# Altium PCB PCB1_NQI_MEZ.PcbDoc
Units mm, origin at the board's own origin, x right, y up, seen from the top; angles counter-clockwise.
Board outline 61.5 x 59 mm, 2 copper layers (Top Layer, Bottom Layer); 4 components, 19 nets, 45 pads, 0 vias.
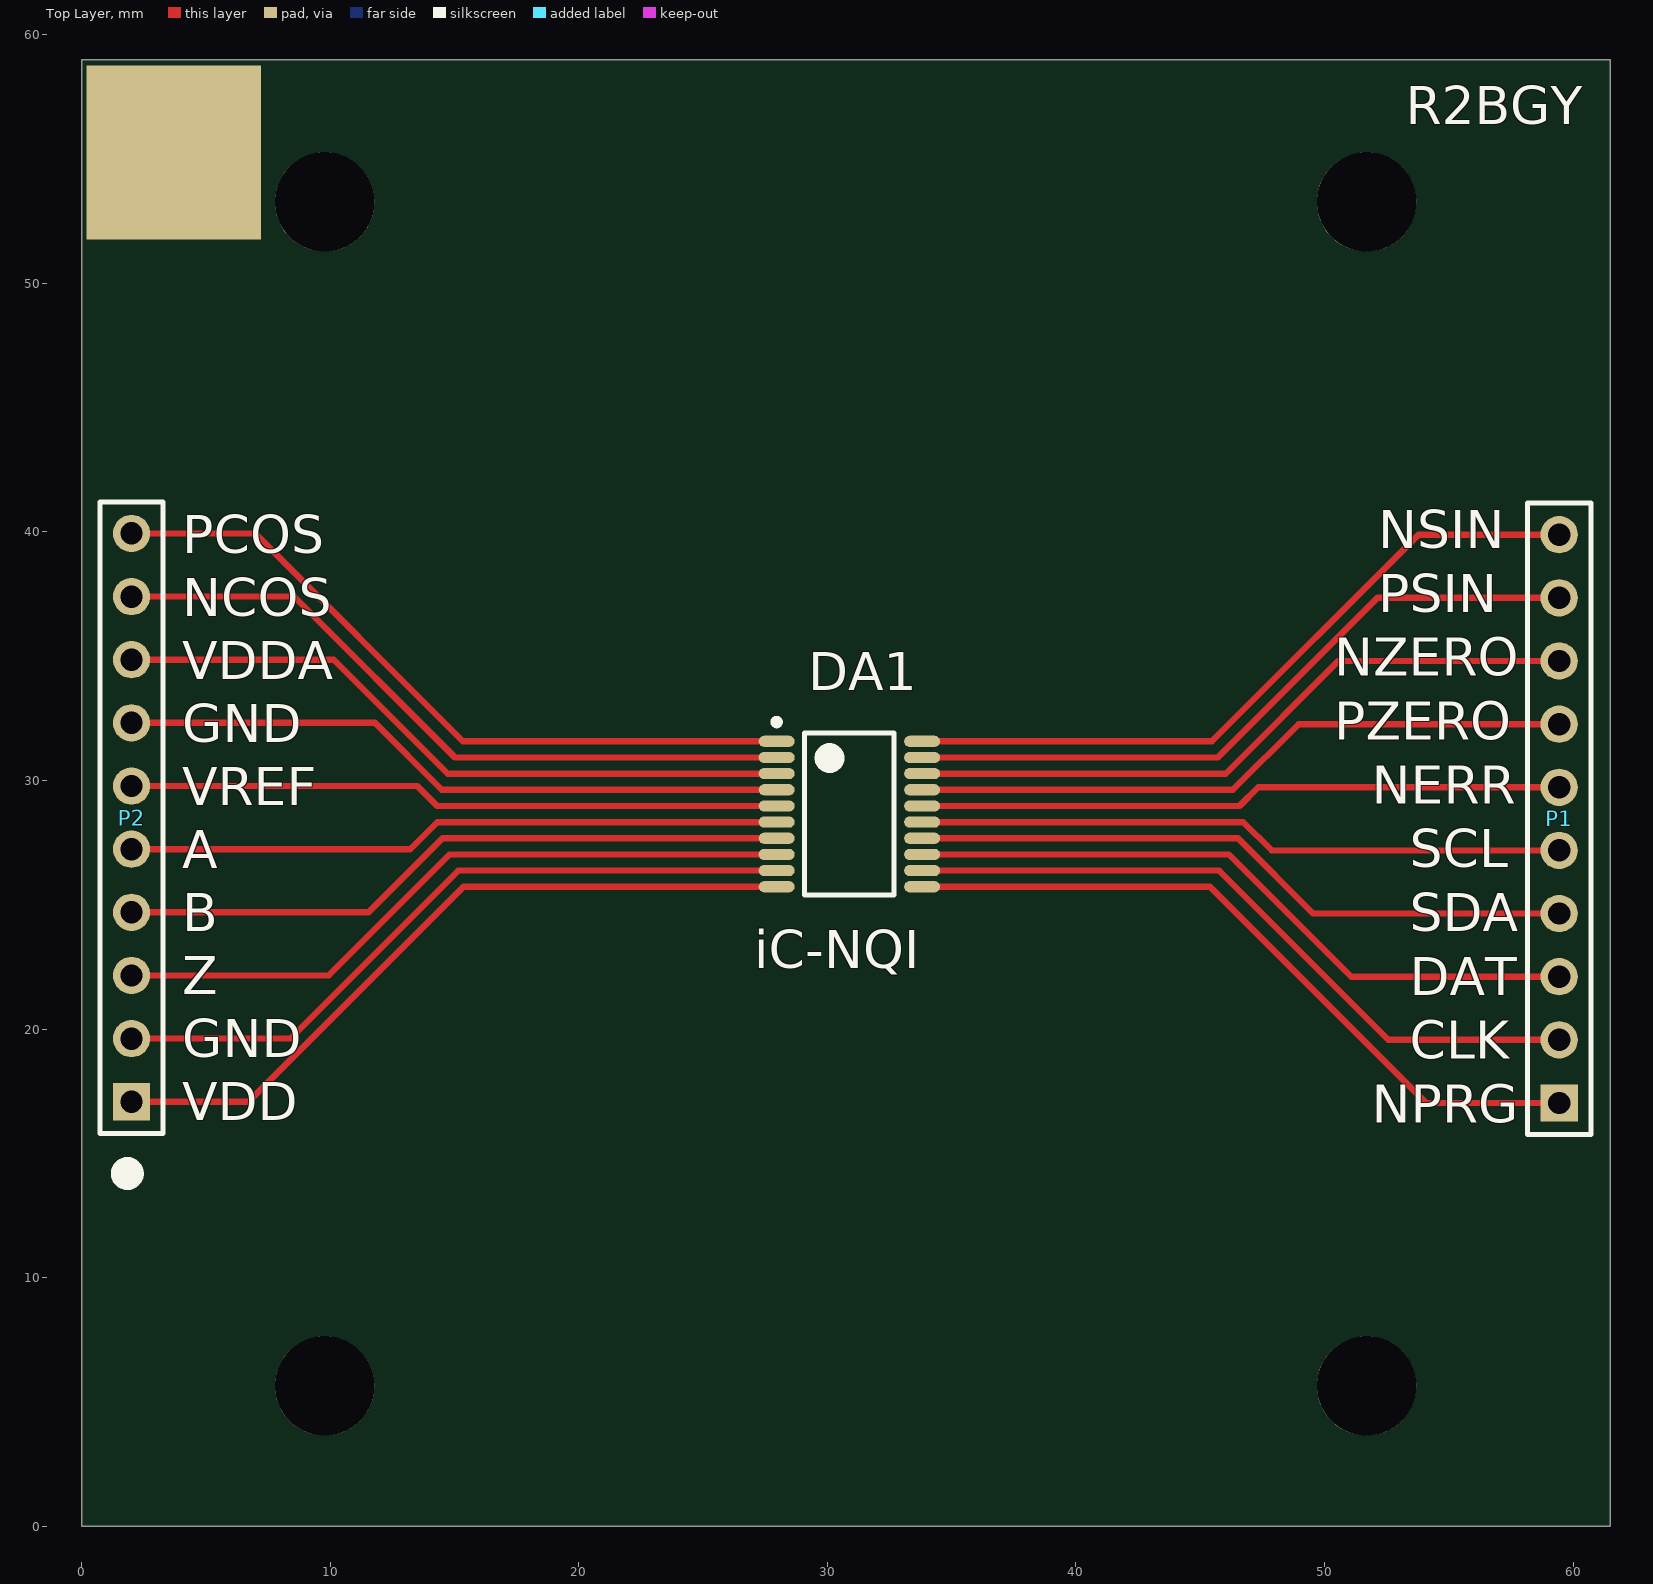
[diagram p0: Top Layer view]
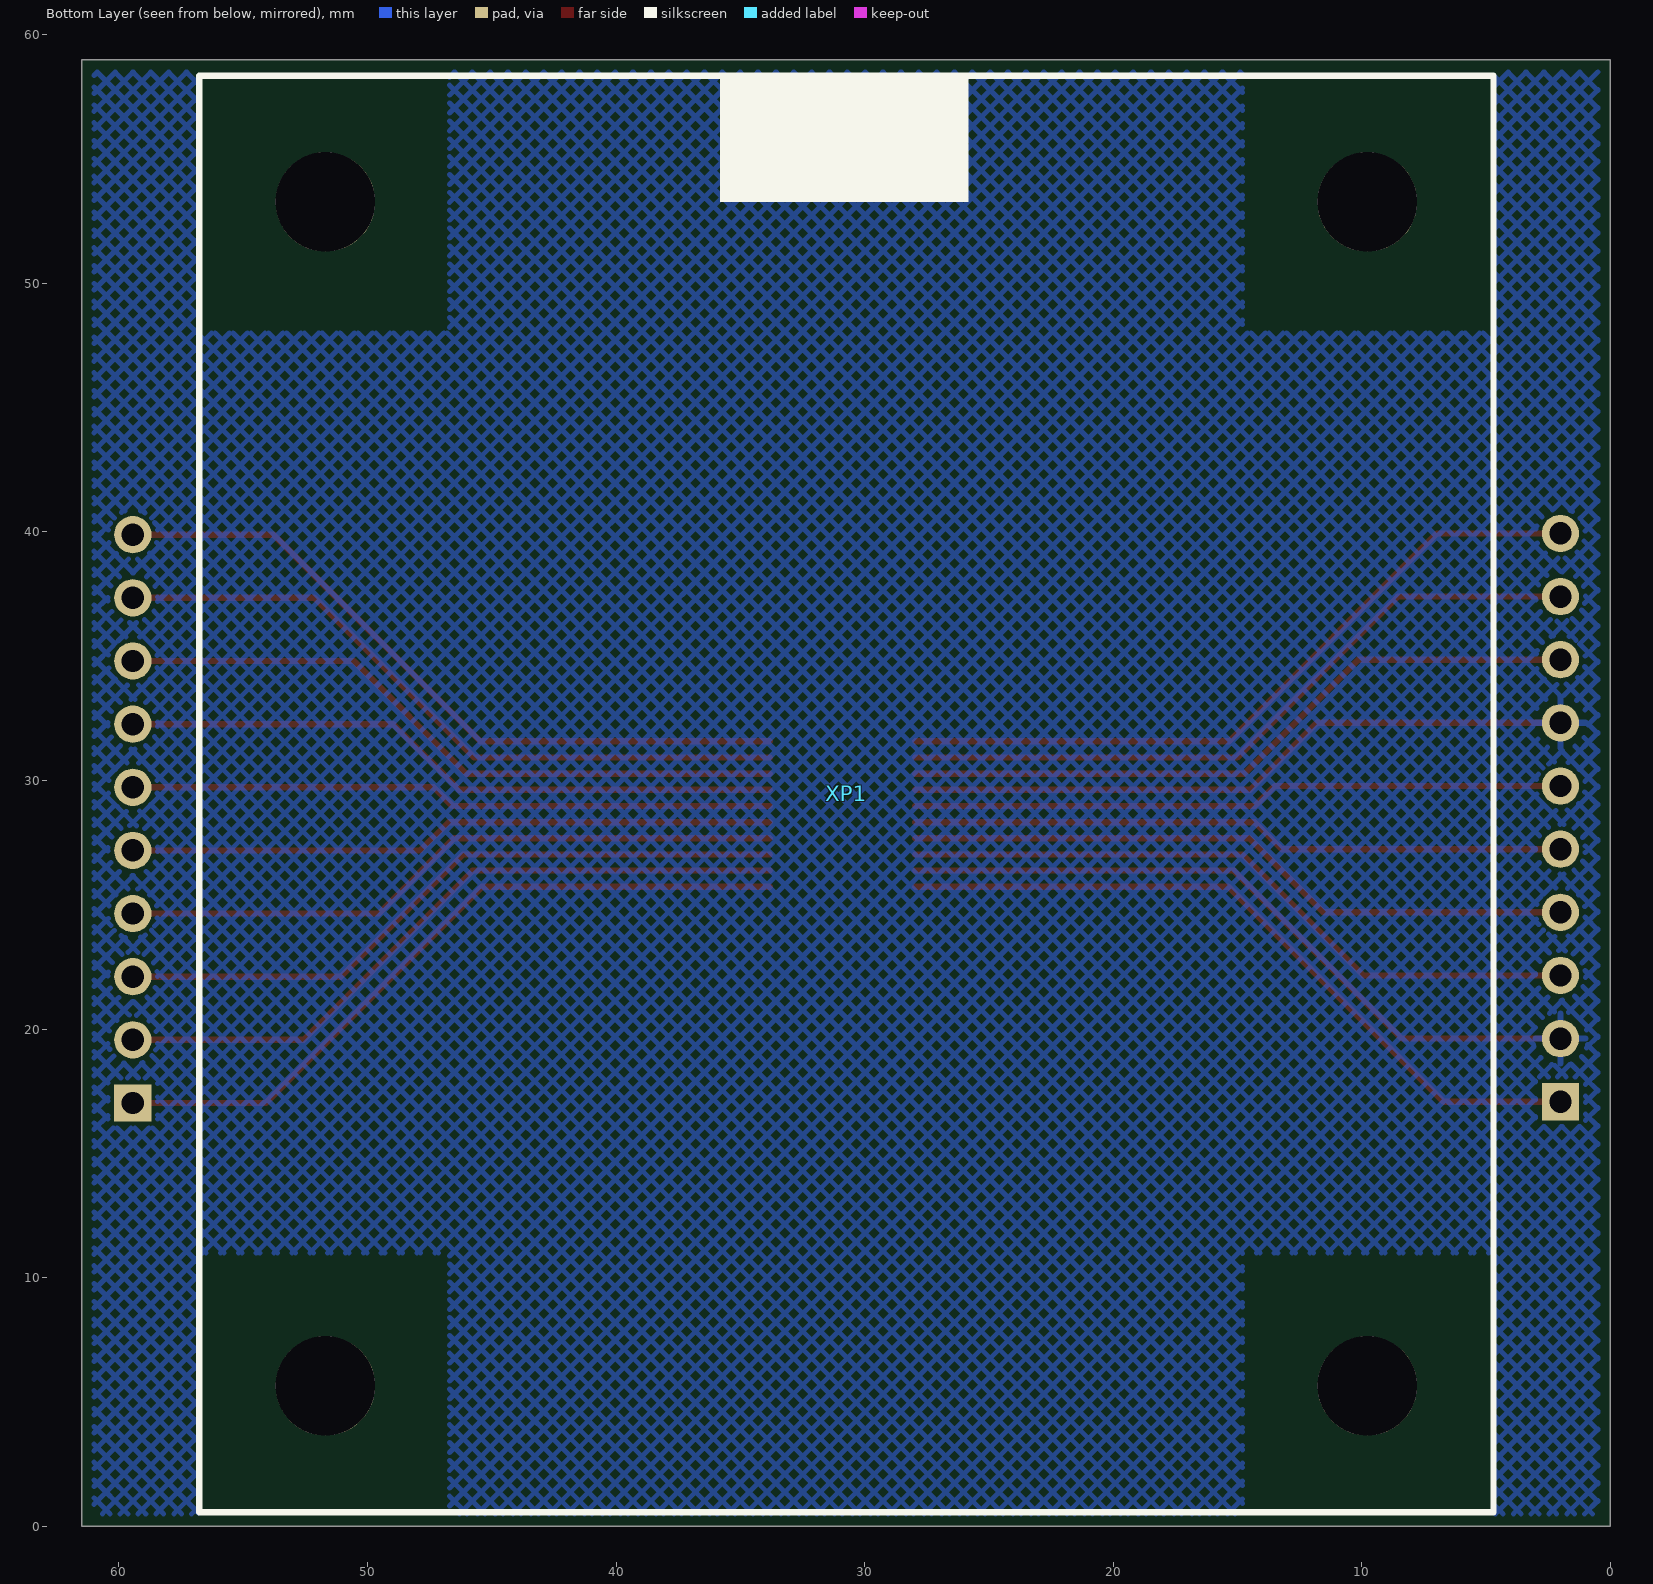
[diagram p1: Bottom Layer view, seen from below]

## Layer stack, top to bottom
Top Solder: solder mask 0.0102, Solder Resist, Dk 3.5
Top Layer: signal copper 0.0356
Dielectric 1: dielectric 0.32, FR-4, Dk 4.8
Bottom Layer: signal copper 0.0356
Bottom Solder: solder mask 0.0102, Solder Resist, Dk 3.5

## Board outline
0,0 0,59 61.5,59 61.5,0

## Design rules (kind name [scope] priority, off if disabled: settings)
Clearance [All] p1: gap=0.15 ignorepadtopadclearanceinfootprint=FALSE
HoleSize [All] p1: absolutevalues=TRUE maxlimit=10 minlimit=0.025 maxpercent=80.000 minpercent=20.000
PolygonConnect [All] p1: connectstyle=Relief reliefconductorwidth=0.254 reliefentries=4 polygonreliefangle="90 Angle" airgapwidth=0.254
RoutingVias [All] p1: holewidth=0.711 width=1.27 viastyle="Through Hole" minholewidth=0.711 minwidth=1.27 maxholewidth=0.711 maxwidth=1.27
SolderMaskExpansion [All] p1: expansion=0.102 istentingtop=FALSE
Width [All] p1: maxlimit=0.254 minlimit=0.125 preferedwidth=0.254
29 further rules are at their usual default settings.

## Components (designator, comment, footprint, x,y, rotation, side; value= is the part's Value field where it differs from the comment)
DA1 "iC-NQI" iC-NQI 30.886,28.651 r0 top
P1 "Header 10" HDR1X10 59.439,17.027 r90 top
P2 "Header 10" HDR1X10 2.009,17.078 r90 top
XP1 "Грелка" Грелка 51.692,5.648 r270 bottom

## Footprints (in the part's own frame and the unit in brackets; to place one, negate y for a bottom-side part, rotate by r counter-clockwise, add the part's x,y. Pads: shape width x height; smd on the part's side, far side on the other; paste and mask are expansions set on the pad)
HDR1X10 [mm] "Connector; Header; 10 Position"
  rect 1.5x1.5 hole 0.9: 1(0,0)
  round 1.5 hole 0.9: 2(2.54,0) 3(5.08,0) 4(7.62,0) 5(10.16,0) 6(12.7,0) 7(15.24,0) 8(17.78,0) 9(20.32,0) 10(22.86,0)
  silkscreen extent -1.27,-1.27 24.13,1.27
iC-NQI [mm] "TSOP, 20-Leads, Body 6,50x4,40mm, Pitch 0,65mm, IPC Medium Density"
  oval 1.45x0.45 smd: 1(-2.925,2.925) 2(-2.925,2.275) 3(-2.925,1.625) 4(-2.925,0.975) 5(-2.925,0.325) 6(-2.925,-0.325) 7(-2.925,-0.975) 8(-2.925,-1.625) 9(-2.925,-2.275) 10(-2.925,-2.925) 11(2.925,-2.925) 12(2.925,-2.275) 13(2.925,-1.625) 14(2.925,-0.975) 15(2.925,-0.325) 16(2.925,0.325) 17(2.925,0.975) 18(2.925,1.625) 19(2.925,2.275) 20(2.925,2.925)
  silkscreen extent -3.05,-3.25 1.8,3.82, body extent -2.2,-3.25 2.2,3.25, height 1
Грелка [mm]
  round 4 hole 4 unplated: 0(-47.625,0) 0(-47.625,41.91) 0(0,0) 0(0,41.91)
  silkscreen extent -52.7,-5.08 5.08,46.99

## Part data
DA1: "Оптический энкодер"
P1 P2: "Header, 10-Pin", LatestRevisionDate=17-Jul-2002, LatestRevisionNote="Re-released for DXP Platform.", Publisher="Altium Limited"

## Free pads (board coordinates)
  rect 7x7 smd: 2(3.708,55.27)

## Nets (pads, with @x,y where several pads share a name; then routed paths per layer and width w, separated by ;. In a path a pad name is that pad's centre, name@x,y a point inside that pad or via, vN(x,y) a via of type N, cw(c..) or ccw(c..) an arc to the next point about the centre after c; other vN are vias at no path point)
A: DA1.6 P2.5 | length 26.6
  Top Layer w0.254: P2.5@1.809,27.238 13.217,27.238 14.305,28.326 DA1.6
B: DA1.7 P2.4 | length 27.6
  Top Layer w0.254: P2.4@1.64,24.698 11.541,24.698 14.519,27.676 DA1.7
CLK: DA1.12 P1.2 | length 28.6
  Top Layer w0.254: DA1.12 45.76,26.376 52.569,19.567 P1.2@59.552,19.567
DAT: DA1.13 P1.3 | length 27.9
  Top Layer w0.254: DA1.13 46.151,27.026 51.07,22.107 P1.3@59.674,22.107
GND: DA1.4 DA1.9 P2.2 P2.7 | length 56.3
  Top Layer w0.254: P2.7@1.662,32.318 11.802,32.318 14.494,29.626 DA1.4 ; P2.2@1.836,19.618 8.391,19.618 15.149,26.376 DA1.9
NCOS: DA1.2 P2.9 | length 29.1
  Top Layer w0.254: P2.9@1.546,37.398 8.55,37.398 15.022,30.926 DA1.2
NERR: DA1.16 P1.6 | length 26.4
  Top Layer w0.254: DA1.16 46.578,28.976 47.33,29.727 P1.6@59.933,29.727
NPRG: DA1.11 P1.1 | length 29.2
  Top Layer w0.254: DA1.11 45.394,25.726 54.093,17.027 P1.1
NSIN: DA1.20 P1.10 | length 29.4
  Top Layer w0.254: DA1.20 45.47,31.576 53.781,39.887 P1.10@59.771,39.887
NZERO: DA1.18 P1.8 | length 27.8
  Top Layer w0.254: DA1.18 46.024,30.276 50.555,34.807 P1.8@59.771,34.807
PCOS: DA1.1 P2.10 | length 29.9
  Top Layer w0.254: P2.10@1.477,39.938 6.976,39.938 15.338,31.576 DA1.1
PSIN: DA1.19 P1.9 | length 28.6
  Top Layer w0.254: DA1.19 45.709,30.926 52.13,37.347 P1.9@59.773,37.347
PZERO: DA1.17 P1.7 | length 26.9
  Top Layer w0.254: DA1.17 46.314,29.626 48.955,32.267 P1.7@59.633,32.267
SCL: DA1.15 P1.5 | length 26.5
  Top Layer w0.254: DA1.15 46.731,28.326 47.87,27.187 P1.5@59.86,27.187
SDA: DA1.14 P1.4 | length 27.1
  Top Layer w0.254: DA1.14 46.517,27.676 49.546,24.647 P1.4@59.706,24.647
VDD: DA1.10 P2.1 | length 29.9
  Top Layer w0.254: P2.1@1.643,17.078 6.715,17.078 15.363,25.726 DA1.10
VDDA: DA1.3 P2.8 | length 28.5
  Top Layer w0.254: P2.8@1.396,34.858 10.151,34.858 14.733,30.276 DA1.3
VREF: DA1.5 P2.6 | length 26.5
  Top Layer w0.254: P2.6@1.836,29.778 13.503,29.778 14.305,28.976 DA1.5
Z: DA1.8 P2.3 | length 28.3
  Top Layer w0.254: P2.3@1.662,22.158 9.941,22.158 14.809,27.026 DA1.8
pads on no net: XP1.0

## Polygon pours and split planes (outlines as drawn)
GND on Bottom Layer "Top Overlay-No Net" (hatched 45Degree grid 0.508 track 0.203, remove dead copper, pour order 0): 0.5,0.5 61,0.5 61,58.5 0.5,58.5

## Other copper
Bottom Layer:
  pour cut-out: 4.7,11 4.7,0.2 14.8,0.2 14.8,11
  pour cut-out: 46.7,11 46.7,0.3 56.8,0.3 56.8,11
  pour cut-out: 46.7,58.7 46.7,48 56.8,48 56.8,58.7
  pour cut-out: 4.7,58.7 4.7,48 14.8,48 14.8,58.7

## Silkscreen, mask and mechanical layers (free items; w line width, h text height)
Top Overlay:
  circle w0.7: c1.841,14.189 r0.313
  text "R2BGY" at 53.265,56.388 h1.52
  text "NSIN" at 52.16,39.338 h1.52
  text "PCOS" at 4.044,39.138 h1.52
  text "PSIN" at 52.16,36.771 h1.52
  text "NCOS" at 4.044,36.605 h1.52
  text "NZERO" at 50.382,34.204 h1.52
  text "VDDA" at 4.044,34.071 h1.52
  text "PZERO" at 50.382,31.638 h1.52
  text "GND" at 4.044,31.538 h1.52
  text "NERR" at 51.906,29.071 h1.52
  text "VREF" at 4.044,29.005 h1.52
  text "SCL" at 53.429,26.504 h1.52
  text "A" at 4.044,26.471 h1.52
  text "B" at 4.044,23.938 h1.52
  text "SDA" at 53.429,23.938 h1.52
  text "iC-NQI" at 27.064,22.438 h1.52
  text "Z" at 4.044,21.404 h1.52
  text "DAT" at 53.429,21.371 h1.52
  text "GND" at 4.044,18.871 h1.52
  text "CLK" at 53.429,18.804 h1.52
  text "VDD" at 4.044,16.338 h1.52
  text "NPRG" at 51.906,16.238 h1.52
Mechanical 1:
  the board outline again, w0.254